# EAGLE board Board (EAGLE 9.3.0)
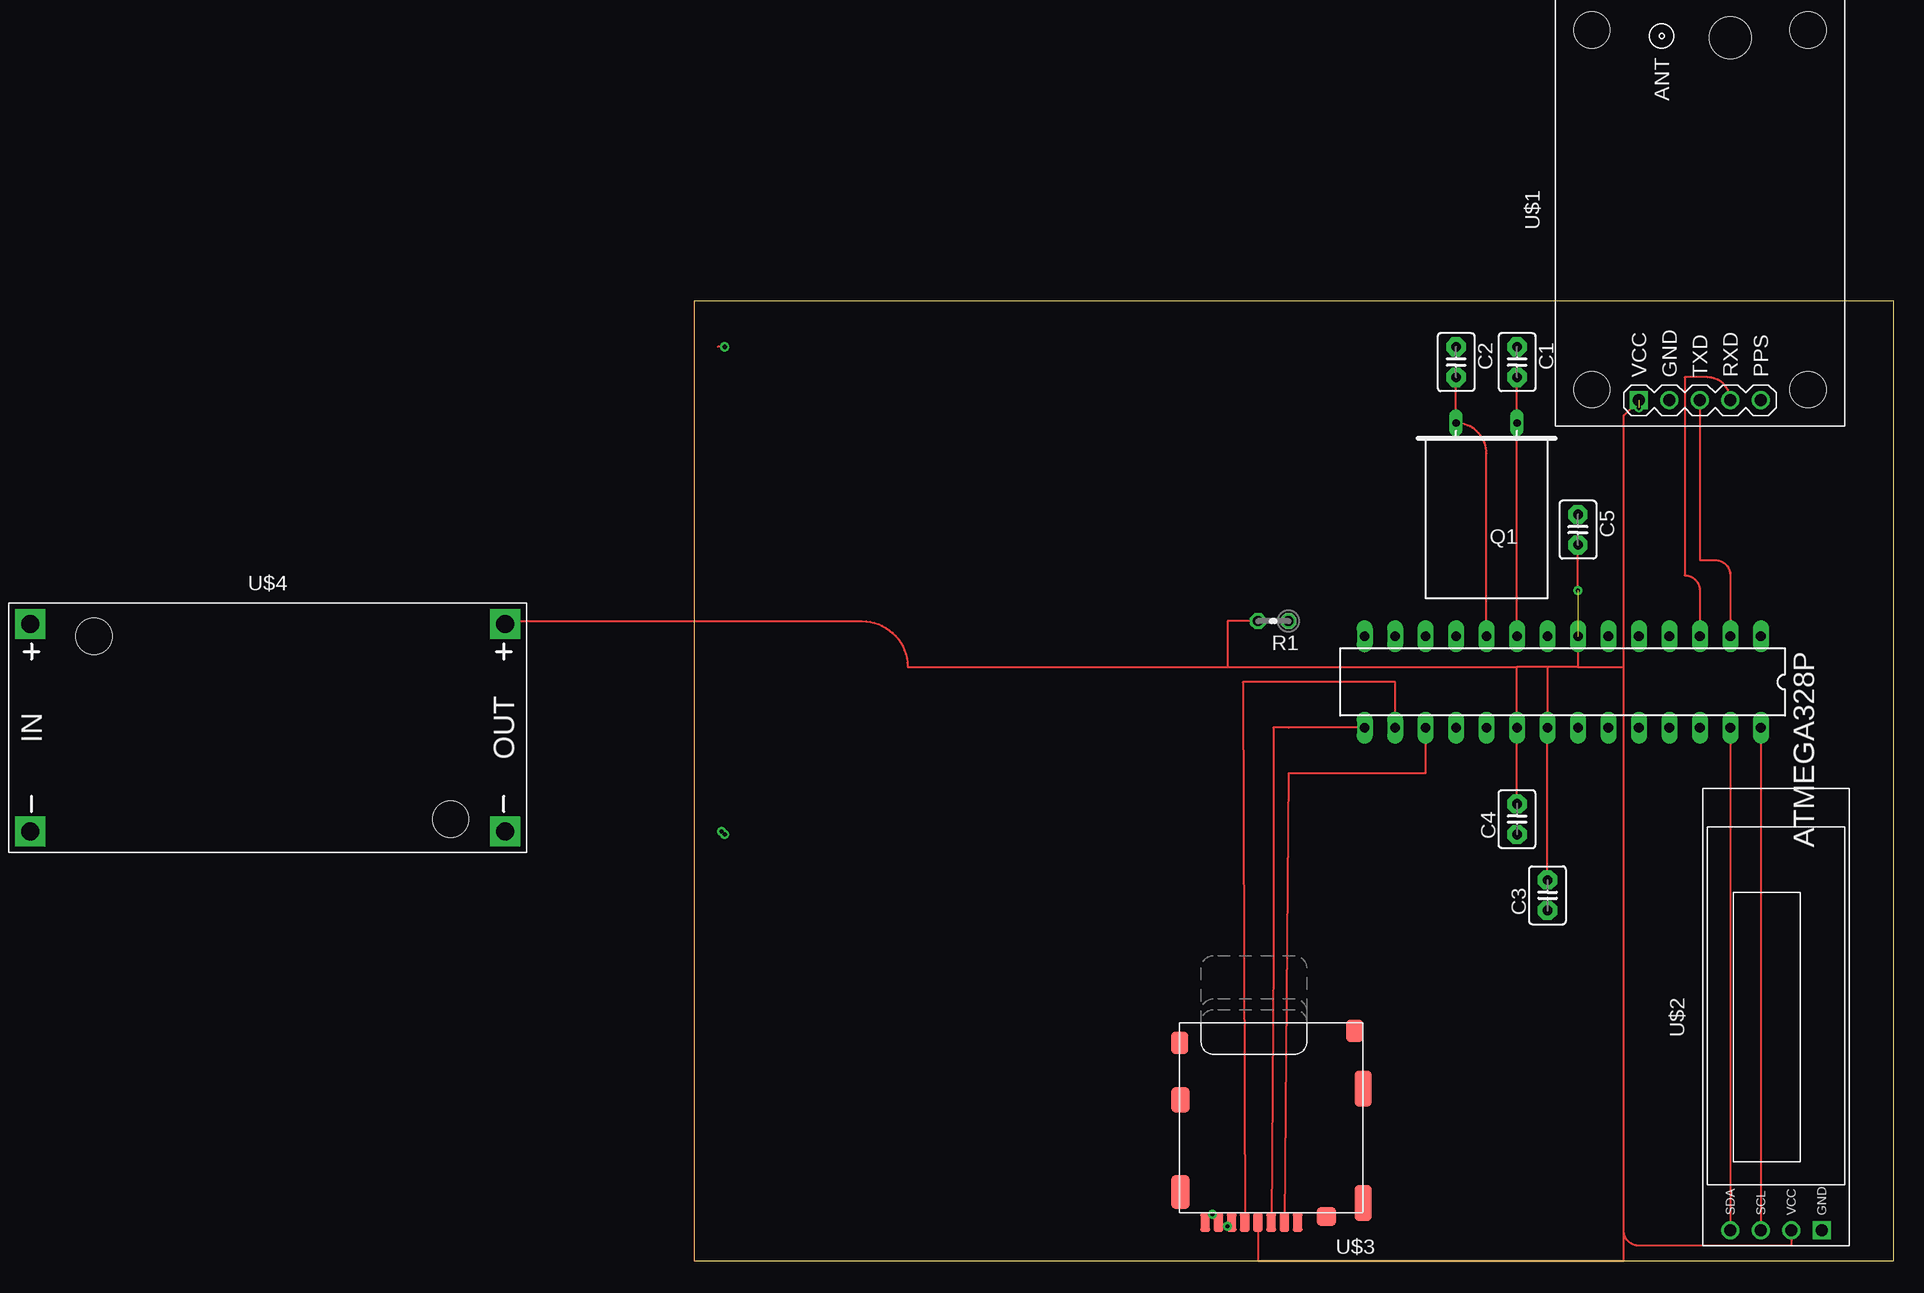
[diagram p0: board, top side]
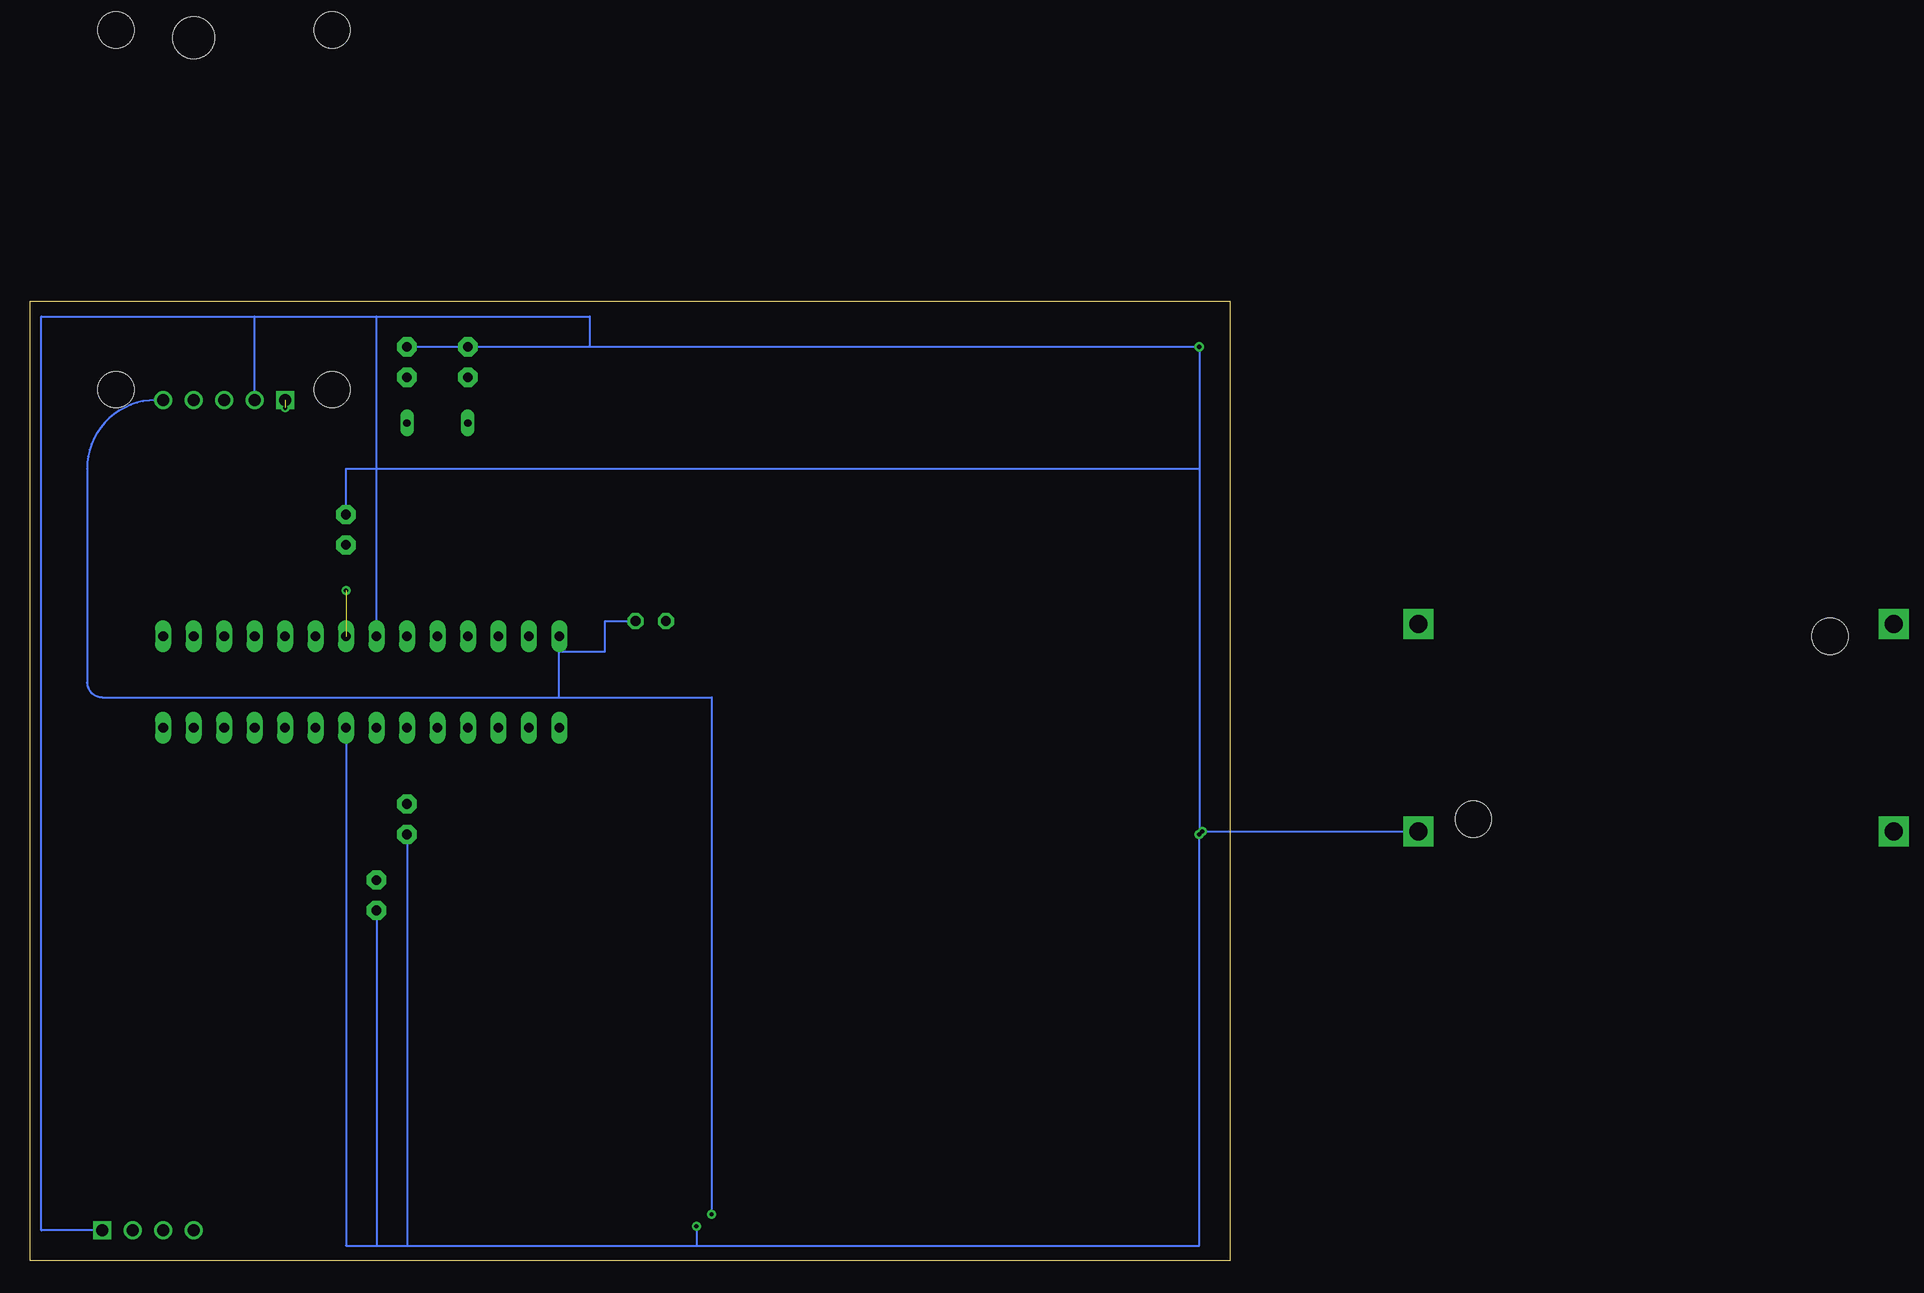
[diagram p1: board, bottom side, seen from below]

Size 100 x 80 mm. Coordinates in mm from the lower left corner, seen from the top.
Outline: 0,0 100,0 100,80 0,80 0,0
Copper layers (1*16): Top 0.035mm / dielectric 1.5mm / Bottom 0.035mm
Design rules "default": minimum track width 6mil, minimum drill 0.35mm, track to track 6mil, track to pad 6mil, pad to pad 6mil, via to via 6mil, smd to smd 6mil, copper to edge 40mil, drill to drill 6mil, minimum pad ring 10mil, minimum via ring 8mil, stop-mask expansion 4mil, vias tented up to drill 0mil, thermal gap 10mil

## Footprints (pad centres in the part's own frame; a part is rotated, then mirrored left to right if it is on the bottom)
DIL28-3 = drill 0.813 long: 1 -16.51,-3.81; 2 -13.97,-3.81; 3 -11.43,-3.81; 4 -8.89,-3.81; 5 -6.35,-3.81; 6 -3.81,-3.81; 7 -1.27,-3.81; 8 1.27,-3.81; 9 3.81,-3.81; 10 6.35,-3.81; 11 8.89,-3.81; 12 11.43,-3.81; 13 13.97,-3.81; 14 16.51,-3.81; 15 16.51,3.81; 16 13.97,3.81; 17 11.43,3.81; 18 8.89,3.81; 19 6.35,3.81; 20 3.81,3.81; 21 1.27,3.81; 22 -1.27,3.81; 23 -3.81,3.81; 24 -6.35,3.81; 25 -8.89,3.81; 26 -11.43,3.81; 27 -13.97,3.81; 28 -16.51,3.81
C2.5-3 = drill 0.813 pad 1.6 octagon: 1 -1.27,0; 2 1.27,0
Q = drill 0.61 long: 1 -2.54,-7.62; 2 2.54,-7.62
0204V = drill 0.813 octagon: 1 -1.27,0; 2 1.27,0
GPS-RECEIVER-NEO6M = drill 1 square: 1 -15.875,5.08 | drill 1: 2 -15.875,2.54; 3 -15.875,0; 4 -15.875,-2.54; 5 -15.875,-5.08 | hole 3: -14.986,9.017; -14.986,-9.017; 14.986,-9.017; 14.986,9.017 | hole 3.5: 14.351,-2.54
DISPLAY-OLED-128X32 = drill 1 square: 1 -17.78,-3.81 | drill 1: 2 -17.78,-1.27; 3 -17.78,1.27; 4 -17.78,3.81
MICRO_SD_CONNECTOR = smd 0.8 x 1.6: 1 -2.03,8.2; 2 -0.93,8.2; 3 0.17,8.2; 4 1.27,8.2; 5 2.37,8.2; 6 3.47,8.2; 7 4.57,8.2; 8 5.67,8.2 | smd 1.55 x 2.8: 9 7.735,5.7 | smd 1.55 x 2.1: 10 7.735,-2 | smd 1.4 x 1.9: 11 7.81,-6.75; 12 -6.79,-7.75 | smd 1.4 x 3: 13 -7.49,-2.95; 14 -7.49,6.6 | smd 1.6 x 1.55: 15 -4.43,7.725
DC-DC-STEP-DOWN-LM2596 = drill 1.5 pad 2.5 square: IN+ -19.812,8.636; IN- -19.812,-8.636; OUT+ 19.812,8.636; OUT- 19.812,-8.636 | hole 3: -14.478,7.62; 15.24,-7.62

## Placement (x,y rotation side)
ATMEGA328P  ATMEGA328P  [DIL28-3]  72.39,48.26 180 top
C1  22pF  [C2.5-3]  68.58,74.93 270 top
C2  22pF  [C2.5-3]  63.5,74.93 270 top
C3  100nF  [C2.5-3]  71.12,30.48 90 top
C4  100nF  [C2.5-3]  68.58,36.83 90 top
C5  100nF  [C2.5-3]  73.66,60.96 270 top
Q1  8MHz  [Q]  66.04,62.23 180 top
R1  4.7k  [0204V]  48.26,53.34 180 top
U$1  GPS-RECEIVER-NEO6M  [GPS-RECEIVER-NEO6M]  83.82,87.63 90 top
U$2  DISPLAY-OLED-128X32  [DISPLAY-OLED-128X32]  90.17,20.32 90 top
U$3  MICROSD  [MICRO_SD_CONNECTOR]  48.26,11.43 180 top
U$4  DC-DC-STEP-DOWN-LM2596  [DC-DC-STEP-DOWN-LM2596]  -35.56,44.45 0 top  (outside the outline)

## Library data of the parts
ATMEGA328P = atmel; OC_FARNELL: unknown; OC_NEWARK: unknown
C1-C5 = capacitor-wima
Q1 = special
R1 = rcl; SPICEPREFIX: R
U$1 U$4 = diy-modules
U$2 = diy-modules (8)
U$3 = con-molex-microsd

## Nets
GND: ATMEGA328P.8 ATMEGA328P.22 C1.1 C2.1 C5.1 U$1.2 U$2.1 U$3.6 U$4.OUT-
N$1: ATMEGA328P.2 U$1.3
N$2: ATMEGA328P.3 U$1.4
N$4: ATMEGA328P.14 R1.1 U$1.5 U$3.7
N$5: ATMEGA328P.15 U$3.3
N$6: ATMEGA328P.16 U$3.5
N$7: ATMEGA328P.17 U$3.2
N$8: ATMEGA328P.27 U$2.4
N$9: ATMEGA328P.28 U$2.3
N$10: C4.1
N$11: C3.1
N$13: ATMEGA328P.9 C1.2 Q1.1
N$14: ATMEGA328P.10 C2.2 Q1.2
VCC: ATMEGA328P.7 ATMEGA328P.20 ATMEGA328P.21 C3.2 C4.2 C5.2 R1.2 U$1.1 U$2.2 U$3.4 U$4.OUT+

## Tracks (layer width: path | path; a pad name or v marks a point on that pad's centre or on a via)
GND  (via drill 0.35)
  Top 0.152: v2.54,76.2 1.97,76.2 | U$3.6 arc90 v44.45,2.89 | v2.54,35.56 arc90 v2.29,35.81
  Bottom 0.152: C1.1 C2.1 53.34,76.2 | 53.34,76.2 v2.54,76.2 2.54,66.04 | 81.28,78.74 71.12,78.74 | 71.12,78.74 53.34,78.74 53.34,76.2 | U$1.2 81.28,78.74 | U$2.1 99.06,2.54 99.06,78.74 81.28,78.74 | ATMEGA328P.8 71.12,78.74 | v44.45,2.89 44.45,1.27 | 44.45,1.27 2.54,1.27 v2.54,35.56 2.54,66.04 | v2.29,35.81 U$4.OUT- | C5.1 73.66,66.04 2.54,66.04 | ATMEGA328P.22 73.66,1.27 44.45,1.27
N$1
  Top 0.152: U$1.3 83.82,58.42 85.09,58.42 arc-90 86.36,57.15 ATMEGA328P.2
N$2
  Top 0.152: U$1.4 arc90 84.45,73.66 82.55,73.66 82.55,57.15 arc-90 83.82,55.88 ATMEGA328P.3
N$3
  Top 0.152: 66.04,52.07 66.04,67.31
N$4  (via drill 0.35)
  Top 0.152: U$3.7 43.77,3.31 arc-90 v43.18,3.89 | ATMEGA328P.14 55.88,50.8
  Bottom 0.152: v43.18,3.89 43.18,46.99 55.88,46.99 | U$1.5 89.53,71.75 arc-90 95.25,66.04 95.25,48.26 arc-90 93.98,46.99 55.88,46.99 | 55.88,46.99 55.88,50.8 | 55.88,50.8 ATMEGA328P.14 | 55.88,50.8 52.07,50.8 52.07,53.34 R1.1
N$5
  Top 0.152: ATMEGA328P.15 49.53,44.45 48.26,44.45 48.26,25.4 U$3.3
N$6
  Top 0.152: ATMEGA328P.16 58.42,48.26 45.72,48.26 U$3.5
N$7
  Top 0.152: ATMEGA328P.17 60.96,40.64 49.53,40.64 U$3.2
N$8
  Top 0.152: ATMEGA328P.27 U$2.4
N$9
  Top 0.152: ATMEGA328P.28 U$2.3
N$10
  Bottom 0.152: C4.1 68.58,1.27
N$11
  Bottom 0.152: C3.1 71.12,1.27
N$12
  Top 0.152: 68.58,52.07 68.58,69.85
N$13
  Top 0.152: Q1.1 C1.2
N$14
  Top 0.152: 66.04,67.31 arc90 Q1.2 C2.2
VCC  (via drill 0.35)  (2 unrouted)
  Top 0.152: v73.66,55.88 C5.2 | U$2.2 91.44,1.27 78.74,1.27 arc-90 77.47,2.54 | U$1.1 77.47,70.48 77.47,49.53 | U$4.OUT+ arc-90 -16.51,53.85 arc90 U$4.OUT+ | U$4.OUT+ arc-90 -15.49,53.34 13.97,53.34 arc-90 17.78,49.53 44.45,49.53 | 77.47,2.54 77.47,0 46.99,0 U$3.4 | 77.47,2.54 77.47,49.53 | ATMEGA328P.7 73.66,49.53 | 73.66,49.53 77.47,49.53 | 73.66,49.53 71.12,49.53 | 71.12,49.53 ATMEGA328P.21 C3.2 | 71.12,49.53 68.58,49.53 | 68.58,49.53 ATMEGA328P.20 C4.2 | 44.45,49.53 68.58,49.53 | R1.2 44.45,53.34 44.45,49.53
  other vias: 78.74,71.12